# Altium PCB usb_uart_converter.PcbDoc
Units mm, origin at the board's own origin, x right, y up, seen from the top; angles counter-clockwise.
Board outline 47.6 x 24.1 mm, 2 copper layers (Top Layer, Bottom Layer); 18 components, 17 nets, 60 pads, 45 vias.
Unrouted connection lines stored in the file: 4.
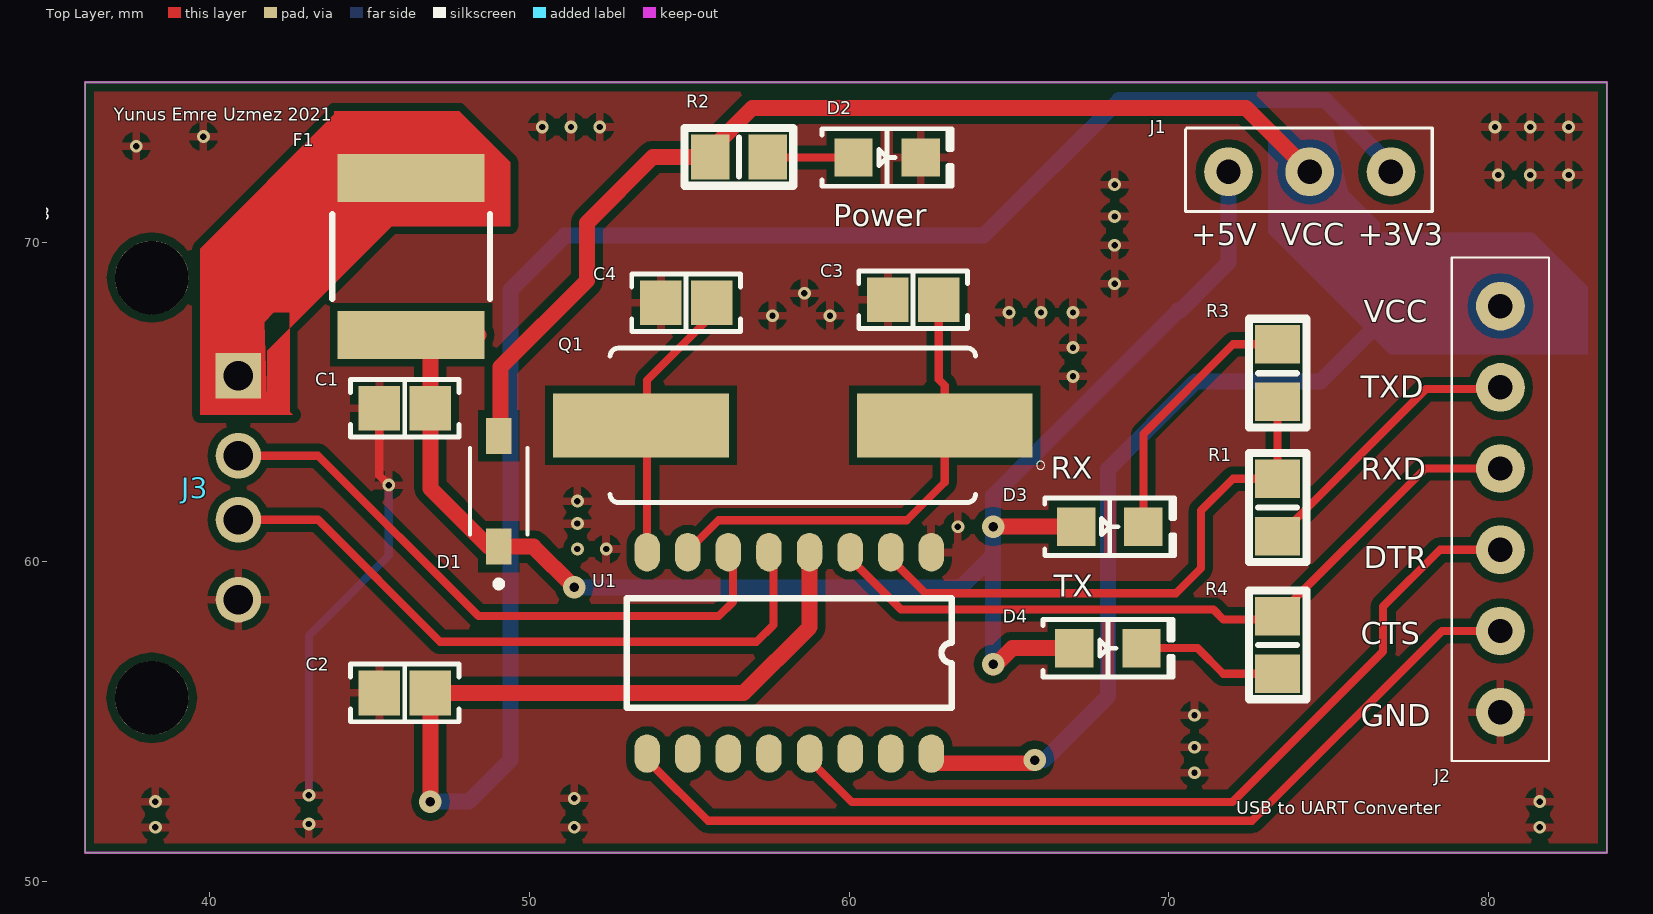
[diagram p0: Top Layer view]
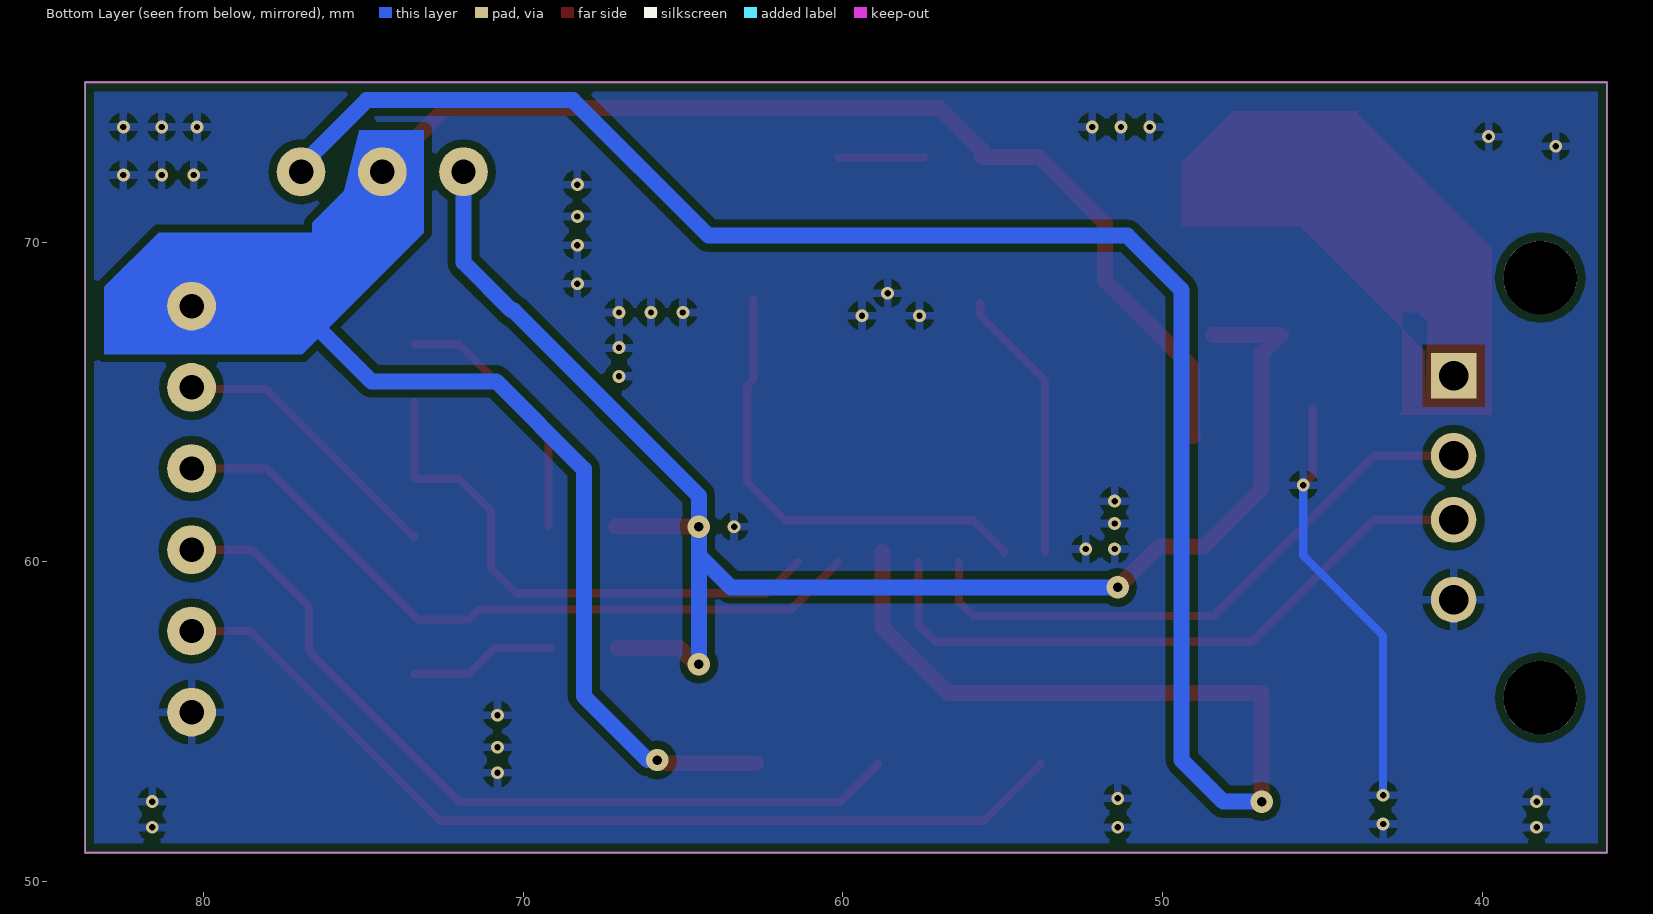
[diagram p1: Bottom Layer view, seen from below]
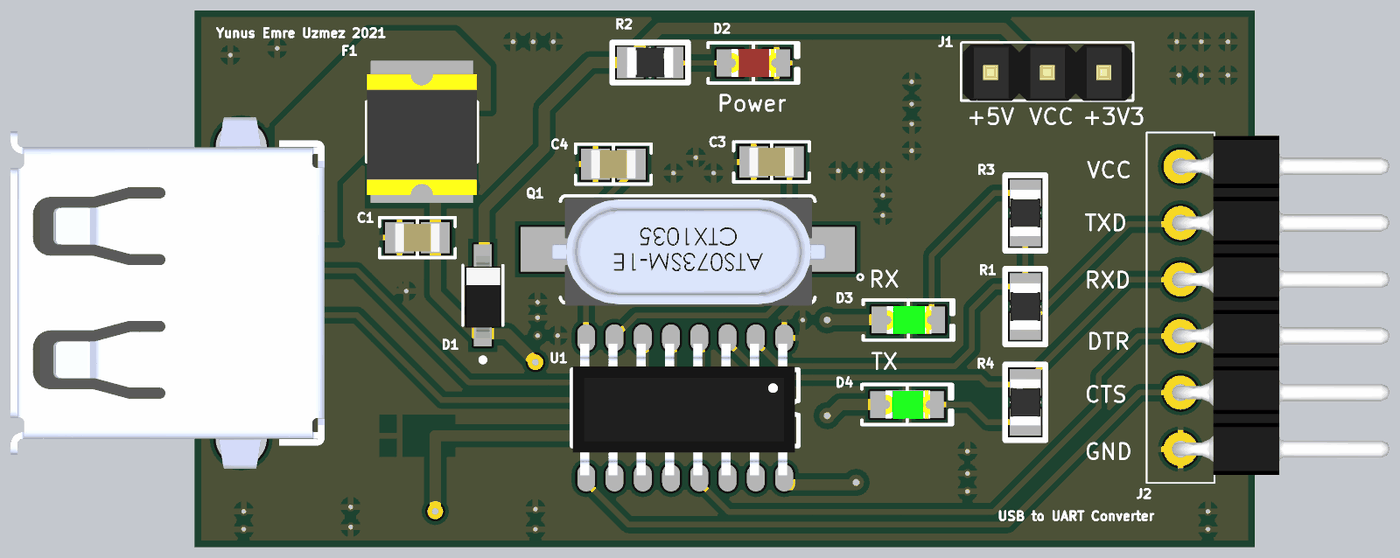
[diagram p2: 3D render of the assembled board from above, using the file's embedded part models]

## Layer stack, top to bottom
Top Solder: solder mask 0.0102, Solder Resist, Dk 3.5
Top Layer: signal copper 0.0356
Dielectric 1: dielectric 0.32, FR-4, Dk 4.8
Bottom Layer: signal copper 0.0356
Bottom Solder: solder mask 0.0102, Solder Resist, Dk 3.5

## Board outline
36.1,50.9 36.1,75 83.7,75 83.7,50.9

## Design rules (kind name [scope] priority, off if disabled: settings)
Clearance [All] p1: gap=0.254 ignorepadtopadclearanceinfootprint=FALSE except(0: Arc-Hole Track-Hole SMDPad-Hole THPad-Hole Via-Hole Fill-Hole Poly-Hole Region-Hole Text-Hole)
HoleToHoleClearance [All] p1: gap=0 allowstackedmicrovias=TRUE
MinimumSolderMaskSliver [All] p1: minsoldermaskwidth=0.01
PolygonConnect [All] p1: connectstyle=Relief reliefconductorwidth=0.254 reliefentries=4 polygonreliefangle="90 Angle" airgapwidth=0.254
RoutingVias [All] p1: holewidth=0.711 width=1.27 viastyle="Through Hole" minholewidth=0.1 minwidth=0.1 maxholewidth=0.711 maxwidth=1.27
SilkToSilkClearance [All] p1: silktosilkclearance=0.01
SilkToSolderMaskClearance [IsPad] p1: minsilkscreentomaskgap=0 clearancetoexposedcopper=TRUE
SolderMaskExpansion [All] p1: expansion=0.102
Width [All] p1: maxlimit=5 minlimit=0.254 preferedwidth=0.254 minimp=50.000000 maximp=50.000000 favimp=50.000000
26 further rules are at their usual default settings.

## Classes and differential pairs
component class usb_uart_converter: C1 C2 C3 C4 D3 D4 F1 J1 J2 J3 Q1 R1 R2 R3 R4 U1

## Components (designator, comment, footprint, x,y, rotation, side; value= is the part's Value field where it differs from the comment)
C1 "10uF C0805" "CAP 0805" 53.582,52.976 r0 top value="10uF 50V"
C2 "10n C0805" "CAP 0805" 53.582,44.076 r0 top value="10n 50V"
C3 "22p C0805" "CAP 0805" 69.482,56.376 r0 top value="22p 50V"
C4 "22p C0805" "CAP 0805" 62.382,56.276 r0 top value="22p 50V"
D1 "MMSZ4668T1G" SOD-123 49.1,62.3 r90 top
D2 "Led Red" "LED RED 0805" 61.2,72.9 r0 top
D3 "Led Green" "LED GREEN 0805" 67.658,61.1 r0 top
D4 "Led Green" "LED GREEN 0805" 67.6,57.3 r0 top
F1 "0.5A Fuse" FUSE 51.38,68.661 r270 top value=500mA
J1 "1x3 Header" "1x3 HEADER" 74.204,72.15 r0 top
J2 "Header 1x6" "1X6 HEADER" 85.194,61.901 r270 top
J3 "USB" "USB TYPE A" 35.9,63.3 r270 top
Q1 "12 MHz Oscillator" OSCILLATOR 58.3,64.2 r180 top value=12Mhz
R1 "0.33K R0805" "RES 0805" 73.336,61.652 r270 top value=1k
R2 "0.33K R0805" "RES 0805" 56.6,72.6 r0 top value=1k
R3 "0.33K R0805" "RES 0805" 73.464,65.952 r90 top value=1k
R4 "0.33K R0805" "RES 0805" 73.336,57.352 r270 top value=1k
U1 "CH340G" SOP-16 62.57,60.3 r270 top

## Footprints (in the part's own frame and the unit in brackets; to place one, negate y for a bottom-side part, rotate by r counter-clockwise, add the part's x,y. Pads: shape width x height; smd on the part's side, far side on the other; paste and mask are expansions set on the pad)
"1x3 HEADER" [mil]
  round 60 hole 30: 1(-92.13,1.97) 2(7.87,1.97) 3(107.87,1.97)
  silkscreen extent -145,-47 159,56, body extent -142,-48 158,52, height 362
"1X6 HEADER" [mil]
  round 60 hole 30: 1(-240,-190) 2(-140,-190) 3(-40,-190) 4(60,-190) 5(160,-190) 5(160,-190) 6(260,-190)
  silkscreen extent -300,-250 320,-130, body extent -294,-205 306,180, height 129
"CAP 0805" [mm]
  rect 1.3x1.4 smd: 1(-8.282,11.824) 2(-6.682,11.824)
  silkscreen extent -9.18,10.92 -5.78,12.72, body extent -8.48,11.19 -6.48,12.46, height 1.26
FUSE [mm]
  rect 1.5x4.6 smd paste+0 mask+0: 1(-3.339,-5.08) 2(1.561,-5.08)
  silkscreen extent -2.21,-7.54 0.44,-2.62, body extent -3.48,-7.54 1.96,-2.61, height 0.8
"LED GREEN 0805" [mm]
  rect 1.2x1.2 smd: 1(-0.558,0) 2(1.542,0)
  silkscreen extent -1.54,-0.9 2.52,0.9, body extent -0.48,-0.62 1.52,0.62, height 1.08
"LED RED 0805" [mm]
  rect 1.2x1.2 smd: 1(-1.066,-0.254) 2(1.034,-0.254)
  silkscreen extent -2.05,-1.15 2.02,0.65, body extent -1,-0.88 1,0.37, height 1.1
OSCILLATOR [mm]
  rect 5.5x2 smd: 1(-4.688,-0.07) 2(4.812,-0.07)
  silkscreen extent -7.81,-2.48 5.78,2.34, body extent -6.13,-2.37 6.18,2.45, height 4.31
"RES 0805" [mm]
  rect 1.2x1.4 smd: 1(-0.948,0.064) 2(0.852,0.064)
  silkscreen extent -1.75,-0.84 1.65,0.96, body extent -1.1,-0.61 1,0.74, height 0.6
SOD-123 [mm]
  rect 1.12x0.8 smd: 1(-1.823,0.06) 2(1.637,0.06)
  silkscreen extent -3.09,-0.84 1.26,0.96, body extent -2.02,-0.75 1.68,0.85, height 1.27
SOP-16 [mm]
  oval 1.2x0.8 smd: 1(0,0) 2(0,-1.27) 3(0,-2.54) 4(0,-3.81) 5(0,-5.08) 6(0,-6.35) 7(0,-7.62) 8(0,-8.89) 9(6.3,-8.89) 10(6.3,-7.62) 11(6.3,-6.35) 12(6.3,-5.08) 13(6.3,-3.81) 14(6.3,-2.54) 15(6.3,-1.27) 16(6.3,0)
  silkscreen extent 1.43,-9.53 4.87,0.64, body extent 0.27,-9.49 6.18,0.49, height 1.45
"USB TYPE A" [mm]
  rect 1.428x1.428 hole 0.92: 1(-2.518,4.996)
  round 1.428 hole 0.92: 2(-0.018,4.996) 3(1.982,4.996) 4(4.482,4.996)
  round 2.3 hole 2.3 unplated: ""(-5.588,2.286) ""(7.552,2.286)
  body extent -6.91,-8.07 8.89,6.03, height 9.56

## Part data
D2: Name="Red Led"
D3 D4: Name="Green Led"
U1: Name=CH340G

## Via types
v1: diameter 0.4, hole 0.2, Top Layer to Bottom Layer, tented both sides, 40 vias
v2: diameter 0.7, hole 0.3, Top Layer to Bottom Layer, tented both sides, 3 vias
v3: diameter 0.7, hole 0.3, Top Layer to Bottom Layer, 2 vias

## Nets (pads, with @x,y where several pads share a name; then routed paths per layer and width w, separated by ;. In a path a pad name is that pad's centre, name@x,y a point inside that pad or via, vN(x,y) a via of type N, cw(c..) or ccw(c..) an arc to the next point about the centre after c; other vN are vias at no path point)
+3V3: C2.2 J1.3 U1.4 | length 67.8
  Top Layer w0.5: v3(46.9,52.5) C2.2 56.7,55.9 58.76,57.96 U1.4 ; J1.3@76.944,71.676 J1.3
  Bottom Layer w0.5: v3(46.9,52.5) 48.1,52.5 49.4,53.8 49.4,68.5 51.1,70.2 64.2,70.2 68.444,74.444 74.894,74.444 76.944,72.394 J1.3
+5V: C1.2 D1.1 D3.1 D4.1 F1.2 J1.1 | length 50.4
  Top Layer w0.5: F1.2@48.4,67.1 F1.2 46.9,66.5 C1.2 46.9,62.3 48.723,60.477 D1.1 50.123,60.477 v3(51.4,59.2) ; v2(64.5,56.8) 64.5,56.7 65.1,57.3 D4.1 ; v2(64.5,61.1) D3.1
  Bottom Layer w0.5: v3(51.4,59.2) 63.5,59.2 64.5,60.2 ; v2(64.5,56.8) 64.5,60.2 ; J1.1 71.864,69.364 70.354,67.854 70.288,67.854 64.5,62.066 v2(64.5,61.1) 64.5,60.2
CTS: J2.5 U1.9 | length 29.8
  Top Layer w0.254: U1.9@53.82,53.7 53.82,53.666 55.586,51.9 72.6,51.9 78.537,57.837 J2.5@80.368,57.837
D+: J3.3 U1.5 | length 20.5
  Top Layer w0.254: J3.3 43.382,61.318 47.2,57.5 57.1,57.5 57.63,58.03 U1.5@57.63,60
D-: J3.2 U1.6 | length 19
  Top Layer w0.254: J3.2 43.382,63.318 48.4,58.3 55.92,58.3 56.36,58.74 U1.6@56.36,60
DTR: J2.4 U1.13 | length 26.1
  Top Layer w0.254: U1.13@58.9,53.7 58.9,53.666 60.082,52.484 71.984,52.484 76.7,57.2 76.7,58.6 78.477,60.377 J2.4
GND: C1.1 C2.1 C3.1 C4.1 D2.2 J2.6 J3.4 U1.1 | length 13.3
  Top Layer w0.254: C1.1 45.3,62.7 v1(45.6,62.4)
  Bottom Layer w0.254: v1(43.1,52.7) 43.1,57.7 45.6,60.2 v1(45.6,62.4)
  other v1: 38.3,51.7 51.4,51.7 81.6,51.7 43.1,51.8 38.3,52.5 81.6,52.5 51.4,52.6 70.8,53.4 70.8,54.2 70.8,55.2 51.5,60.4 52.4,60.4 63.4,61.1 51.5,61.2 51.5,61.9 67,65.8 67,66.7 57.6,67.7 59.4,67.7 65,67.8 66,67.8 67,67.8 58.6,68.4 68.3,68.7 68.3,69.9 68.3,70.8 68.3,71.8 80.3,72.1 81.3,72.1 82.5,72.1 37.7,73 39.8,73.3 50.4,73.6 51.3,73.6 52.2,73.6 80.2,73.6 81.3,73.6 82.5,73.6
NetC3_2: C3.2 Q1.1 U1.7 | length 14.8
  Top Layer w0.254: U1.7 54.95,60.334 55.916,61.3 61.8,61.3 62.988,62.488 Q1.1 62.988,65.512 62.8,65.7 C3.2
NetC4_2: C4.2 Q1.2 U1.8 | length 8.6
  Top Layer w0.254: U1.8 53.68,65.68 55.7,67.7 C4.2
NetD2_1: D2.1 R2.2 | length 2.7
  Top Layer w0.254: R2.2 57.47,72.646 D2.1
NetD3_2: D3.2 R3.2 | length 8.3
  Top Layer w0.254: D3.2 69.2,64 72.004,66.804 R3.2
NetD4_2: D4.2 R4.2 | length 4.6
  Top Layer w0.254: D4.2 70.9,57.3 71.7,56.5 R4.2
NetF1_1: F1.1 J3.1
NetJ2_2: J2.2 R1.2 | length 8.9
  Top Layer w0.254: R1.2 73.439,60.8 78.039,65.4 80.311,65.4 J2.2
RXD: J2.3 R4.1 U1.3 | length 22.9
  Top Layer w0.254: U1.3@60.17,60 60.17,59.966 61.625,58.511 71.389,58.511 71.7,58.2 73.3,58.2 R4.1 78.017,62.917 J2.3
TXD: R1.1 R3.1 U1.2 | length 17.4
  Top Layer w0.254: U1.2@61.44,60 61.406,60 62.387,59.019 70.219,59.019 71,59.8 71,61.6 72,62.6 R1.1 R3.1
VCC: D1.2 J1.2 J2.1 R2.1 U1.16 | length 60.6
  Top Layer w0.5: D1.2 49.1,63.997 49.1,66.1 51.8,68.8 51.8,70.6 53.864,72.664 R2.1 55.652,72.877 56.975,74.2 72.404,74.2 J1.2 ; U1.16@62.71,53.7 65.7,53.7 v2(65.8,53.8)
  Bottom Layer w0.5: v2(65.8,53.8) 66.1,53.8 68.1,55.8 68.1,62.9 70.846,65.646 74.746,65.646 77.097,67.997 J2.1
pads on no net: J3. U1.10 U1.11 U1.12 U1.14 U1.15

## Polygon pours and split planes (outlines as drawn)
GND on Top Layer "GND_L01_P036" (solid, pour order 36): 36.1,75 83.7,75 83.7,50.9 36.1,50.9
GND on Top Layer "GND_L01_P012" (solid, pour order 12): 66.2,79.8
GND on Top Layer "GND_L01_P006" (solid, pour order 6): 36.1,75
GND on Top Layer "GND_L01_P004" (solid, pour order 4): 69.8,89.5
GND on Bottom Layer "GND_L02_P034" (solid, pour order 34): 36.1,75 83.7,75 83.7,50.9 36.1,50.9
GND on Bottom Layer "GND_L02_P020" (solid, pour order 20): 83,81.1

## Keep-outs
Keep-Out Layer:
  the board outline again, w0.07

## Other copper
Top Layer:
  region net NetF1_1: 41.8,64.6 41.8,66.6 45.7,70.5 49.4,70.5 49.4,72.5 47.8,74.1 43.9,74.1 43.9,74 39.7,69.8 39.7,64.6 42.6,64.6 42.5,64.7 42.5,67.8 42,67.8 41.7,67.5
  region net NetF1_1: 57.1,61.9
  region net NetF1_1: 48.2,75.6
Bottom Layer:
  region net VCC: 73.1,73.5 73.1,70.3 76.9,66.5 83.1,66.5 83.1,68.6 81.4,70.3 76.6,70.3 76.6,70.6 75.6,71.6 75.125,73.5

## Silkscreen, mask and mechanical layers (free items; w line width, h text height)
Top Overlay:
  text "Yunus Emre Uzmez 2021" at 37,73.8 h0.4
  text "Power" at 59.5,70.5 h0.7
  text "+5V" at 70.7,69.9 h0.7
  text "VCC" at 73.5,69.9 h0.7
  text "+3V3" at 75.9,69.9 h0.7
  text "VCC" at 76.1,67.5 h0.7
  text "TXD" at 76,65.131 h0.7
  text "RX" at 66.3,62.6 h0.7
  text "RXD" at 76,62.561 h0.7
  text "DTR" at 76.1,59.8 h0.7
  text "TX" at 66.4,58.9 h0.7
  text "CTS" at 76,57.422 h0.7
  text "GND" at 76,54.853 h0.7
  text "USB to UART Converter" at 72.1,52.1 h0.4